# EAGLE board Qwiic GPS-RTK2 - ublox ZED-F9P (EAGLE 9.6.0)
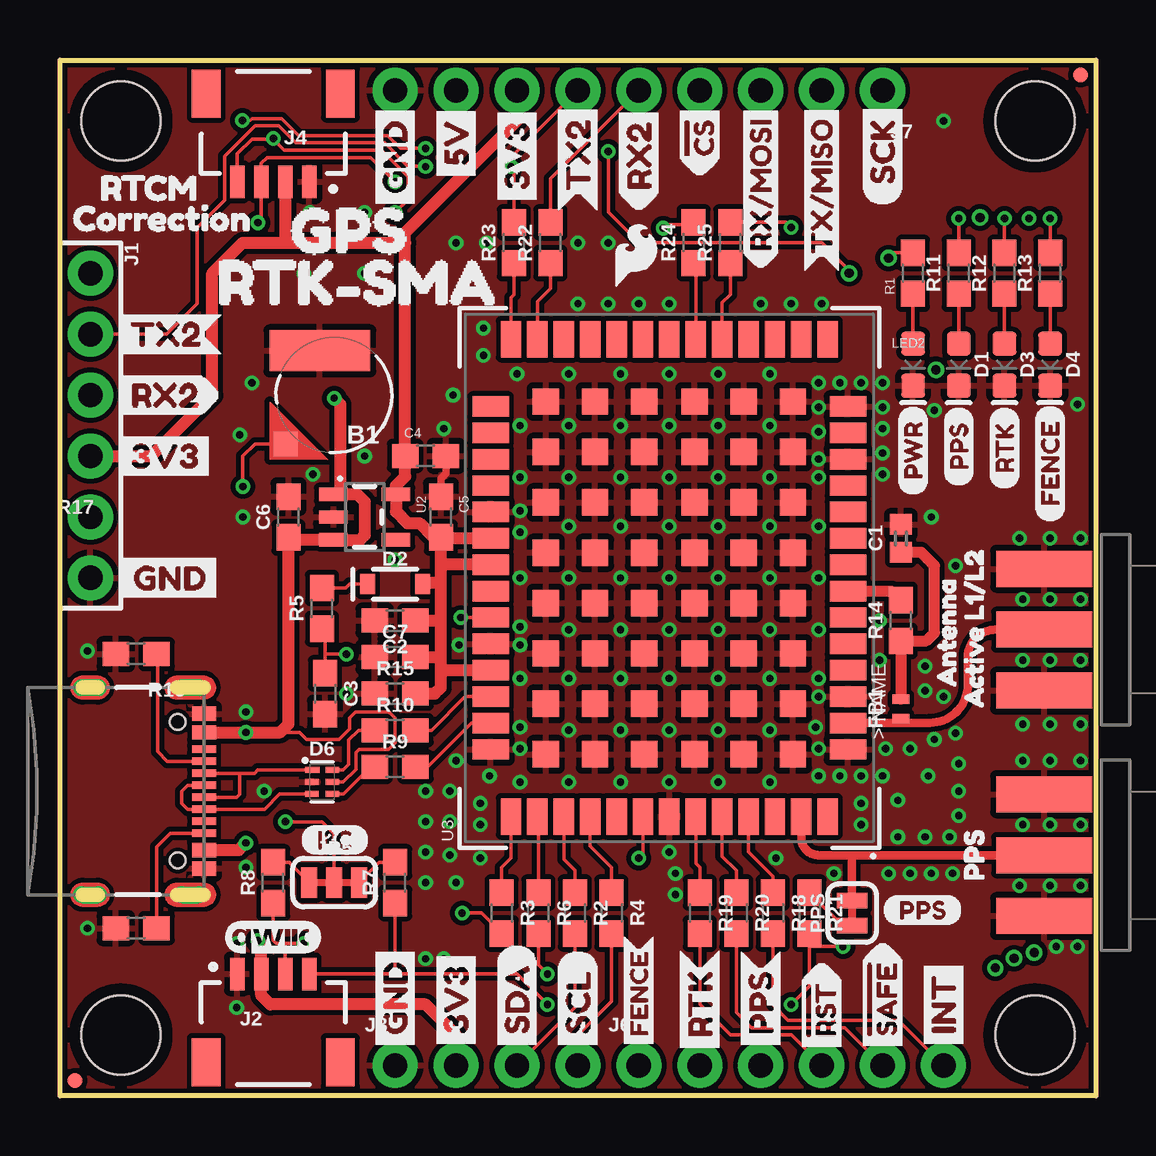
[diagram p0: board, top side]
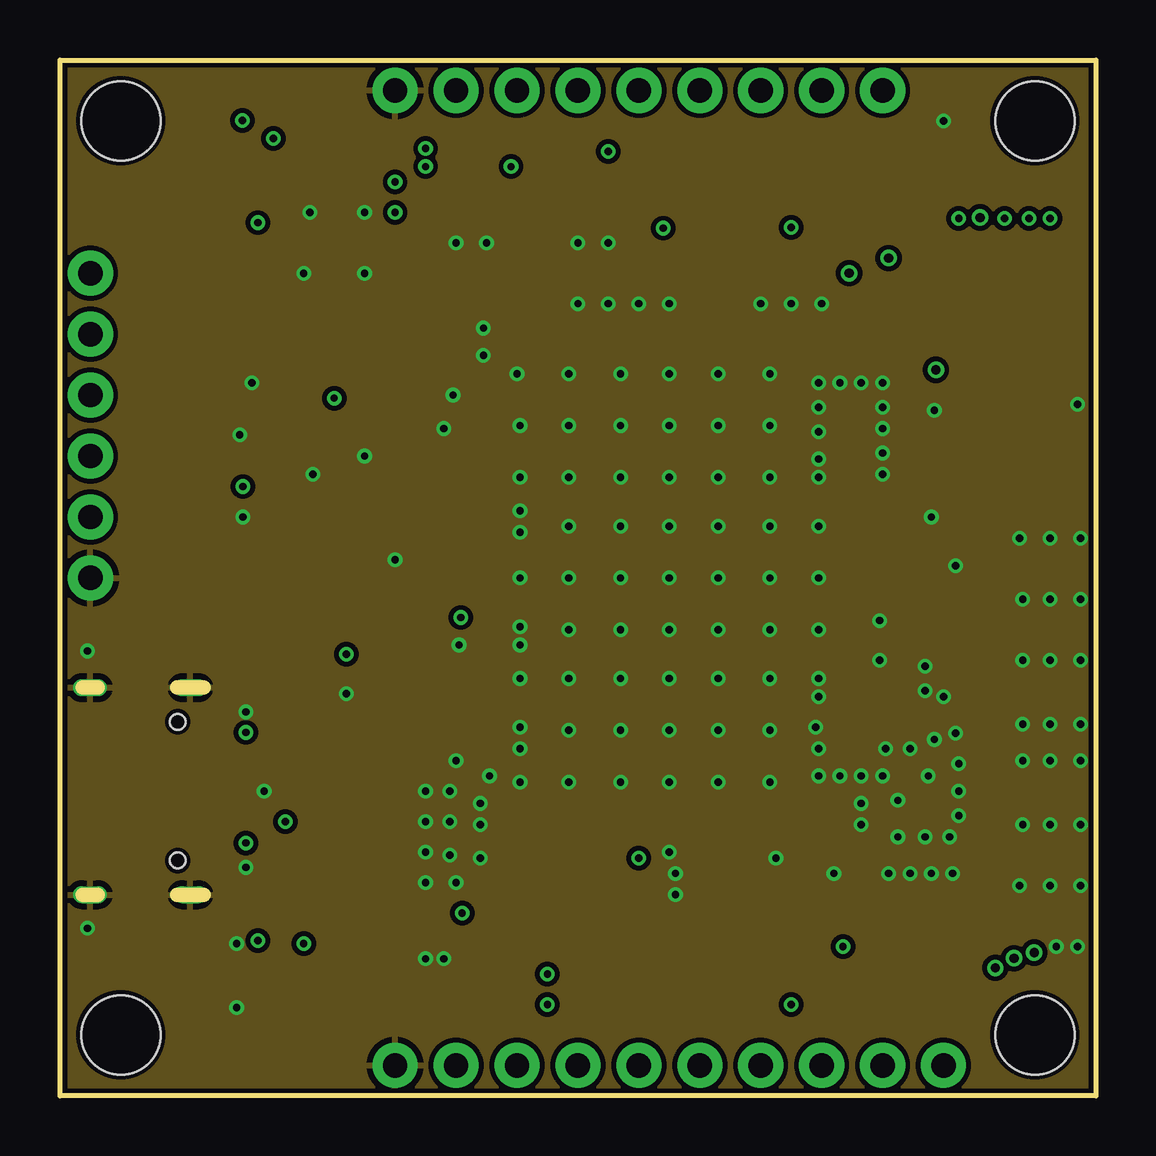
[diagram p1: board, inner layer Route2]
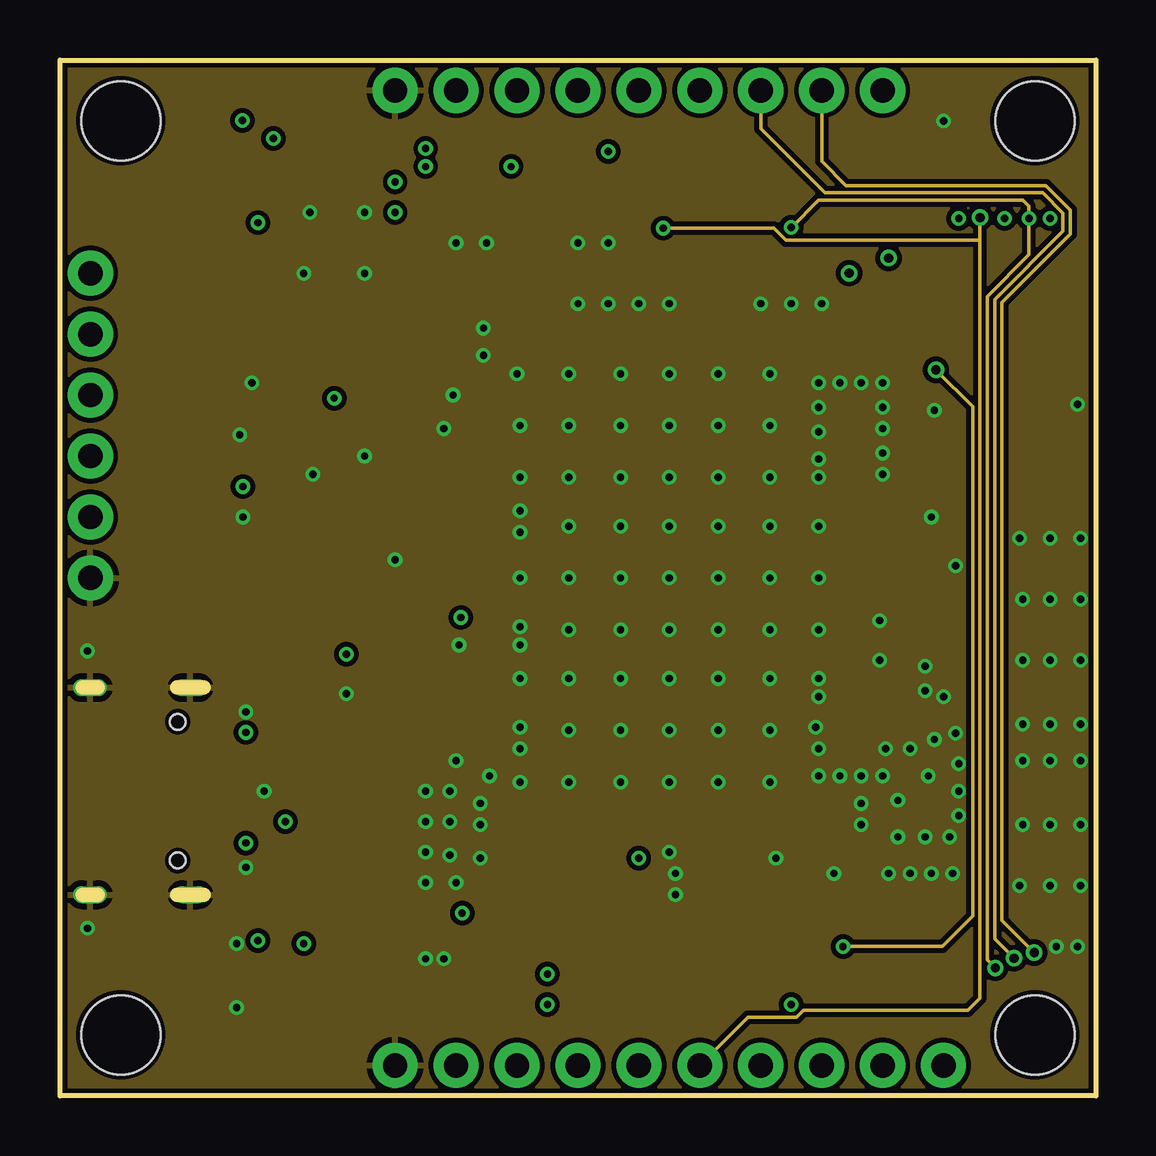
[diagram p2: board, inner layer Route15]
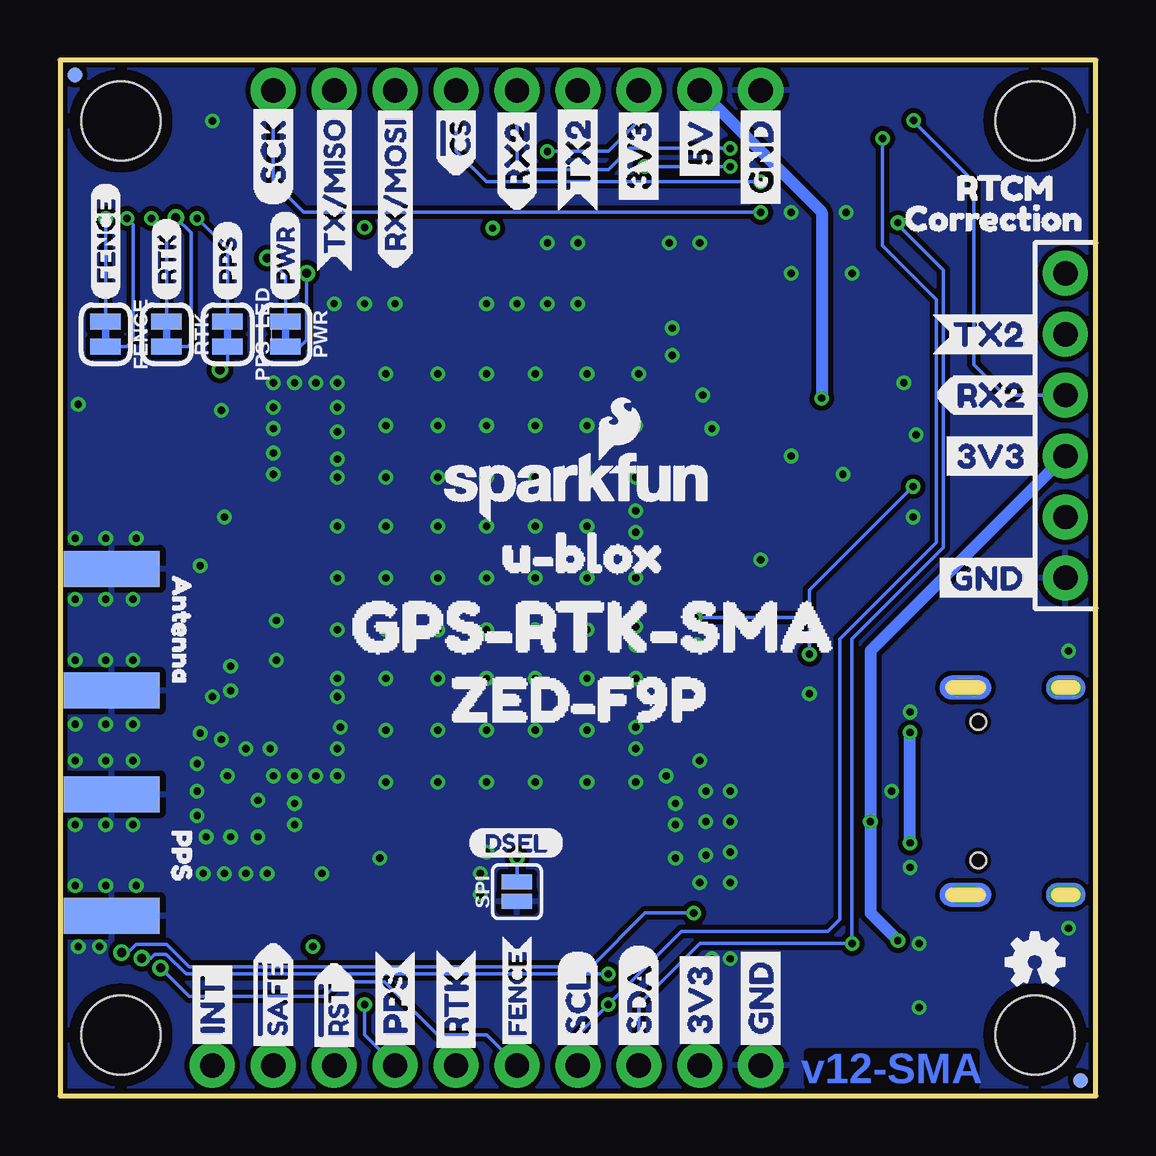
[diagram p3: board, bottom side, seen from below]

Size 43.18 x 43.18 mm. Coordinates in mm from the lower left corner, seen from the top.
Outline: 43.18,0 0,0 0,43.18 43.18,43.18 43.18,0
Copper layers (1+2*15+16): Top 0.035mm / dielectric 1.5mm / Route2 0.035mm / dielectric 0.15mm / Route15 0.035mm / dielectric 0.2mm / Bottom 0.035mm
Design rules "SparkFun-4-layer-MicroMod *": minimum track width 4mil, minimum drill 0.2mm, track to track 4mil, track to pad 4mil, pad to pad 4mil, via to via 4mil, smd to smd 4mil, copper to edge 6mil, drill to drill 6mil, minimum pad ring 6mil, minimum via ring 6mil, stop-mask expansion 4mil, vias tented up to drill 25mil, thermal gap 10mil
Net classes: 1 power: width 0.178 mm; 2 3.3V: width 0.508 mm; 3 RF: width 0.35 mm, clearance 0.203 mm

## Footprints (pad centres in the part's own frame; a part is rotated, then mirrored left to right if it is on the bottom)
ML414H_IV01E = smd 1 x 1: + 2.022,2.032 | smd 4.2 x 1.7: - 0.6,-1.85
0402 = smd 0.85 x 0.9: 1 -0.58,0; 2 0.58,0
0603 = smd 1.1 x 1: 1 -0.85,0; 2 0.85,0
LED-0603 = smd 1 x 1: A -0.877,0; C 0.877,0
SOD-323 = smd 0.63 x 0.83: A 1.15,0; C -1.15,0
SOT886 = smd 0.61 x 0.25: 1 -0.405,0.5 | smd 0.56 x 0.25: 2 -0.43,0; 3 -0.43,-0.5; 4 0.43,-0.5; 5 0.43,0; 6 0.43,0.5
SMA-EDGE = smd 1.5 x 4: GND@0 -2.54,0; GND@1 2.54,0; SIG 0,0 | smd 1.5 x 4 bottom: GND@2 -2.54,0; GND@3 2.54,0
0402_MURATA = smd 0.4 x 0.7: P1 -0.4,0; P2 0.4,0
SMT-JUMPER_2_NC_TRACE_SILK = smd 0.66 x 1.27: 1 -0.521,0; 2 0.521,0
1X06_NO_SILK = drill 1.016 pad 1.88: 1 0,0; 2 2.54,0; 3 5.08,0; 4 7.62,0; 5 10.16,0; 6 12.7,0
JST04_1MM_RA = smd 0.6 x 1.35: 1 -1.5,0; 2 -0.5,0; 3 0.5,0; 4 1.5,0 | smd 1.2 x 2: NC1 2.8,-3.675; NC2 -2.8,-3.675
1X04_NO_SILK = drill 1.016 pad 1.88: 1 0,0; 2 2.54,0; 3 5.08,0; 4 7.62,0
USB-C-16P-2LAYER-PADS = smd 0.3 x 1: A5 -1.25,-0.34; A6 -0.25,-0.34; A7 0.25,-0.34; A8 1.25,-0.34; B5 1.75,-0.34; B6 0.75,-0.34; B7 -0.75,-0.34; B8 -1.75,-0.34 | smd 0.6 x 1: GND -3.225,-0.34; GND2 3.225,-0.34; VBUS1 -2.45,-0.34; VBUS2 2.45,-0.34 | drill 0.4 pad 0.6 long: SHLD1 -4.318,-0.915; SHLD2 4.318,-0.915; SHLD3 -4.318,-5.095; SHLD4 4.318,-5.095 | hole 0.65: -2.89,-1.445; 2.89,-1.445
1X09_NO_SILK = drill 1.016 pad 1.88: 1 0,0; 2 2.54,0; 3 5.08,0; 4 7.62,0; 5 10.16,0; 6 12.7,0; 7 15.24,0; 8 17.78,0; 9 20.32,0
SMT-JUMPER_3_2-NC_TRACE_SILK = smd 0.66 x 1.27: 1 -1.041,0; 2 0,0; 3 1.041,0
MICRO-FIDUCIAL = smd 0.635 x 0.635: 1 0,0
STAND-OFF = hole 3.302: 0,0
SMT-JUMPER_2_NO_SILK = smd 0.635 x 1.27: 1 -0.406,0; 2 0.406,0
SOT23-5 = smd 0.55 x 1.2: 1 -0.95,-1.3; 2 0,-1.3; 3 0.95,-1.3; 4 0.95,1.3; 5 -0.95,1.3
ZED-F9P = smd 0.85 x 1.52: 1 -7.15,-7.45; 2 -6.05,-7.45; 3 -4.95,-7.45; 4 -3.85,-7.45; 5 -2.75,-7.45; 6 -1.65,-7.45; 7 -0.55,-7.45; 8 0.55,-7.45; 9 1.65,-7.45; 10 2.75,-7.45; 11 3.85,-7.45; 12 4.95,-7.45; 13 6.05,-7.45; 14 7.15,-7.45; 28 7.15,7.45; 29 6.05,7.45; 30 4.95,7.45; 31 3.85,7.45; 32 2.75,7.45; 33 1.65,7.45; 34 0.55,7.45; 35 -0.55,7.45; 36 -1.65,7.45; 37 -2.75,7.45; 38 -3.85,7.45; 39 -4.95,7.45; 40 -6.05,7.45; 41 -7.15,7.45 | smd 1.52 x 0.85: 15 9.95,-6.6; 16 9.95,-5.5; 17 9.95,-4.4; 18 9.95,-3.3; 19 9.95,-2.2; 20 9.95,-1.1; 21 9.95,0; 22 9.95,1.1; 23 9.95,2.2; 24 9.95,3.3; 25 9.95,4.4; 26 9.95,5.5; 27 9.95,6.6; 42 -9.95,6.6; 43 -9.95,5.5; 44 -9.95,4.4; 45 -9.95,3.3; 46 -9.95,2.2; 47 -9.95,1.1; 48 -9.95,0; 49 -9.95,-1.1; 50 -9.95,-2.2; 51 -9.95,-3.3; 52 -9.95,-4.4; 53 -9.95,-5.5; 54 -9.95,-6.6 | smd 1.1 x 1.1: 55 -1.05,-1.05; 56 -3.15,-1.05; 57 -5.25,-1.05; 58 -7.35,-1.05; 59 -1.05,-3.1; 60 -3.15,-3.1; 61 -5.25,-3.1; 62 -7.35,-3.1; 63 -1.05,-5.15; 64 -3.15,-5.15; 65 -5.25,-5.15; 66 -7.35,-5.15; 67 -1.05,5.15; 68 -3.15,5.15; 69 -5.25,5.15; 70 -7.35,5.15; 71 -1.05,3.1; 72 -3.15,3.1; 73 -5.25,3.1; 74 -7.35,3.1; 75 -1.05,1.05; 76 -3.15,1.05; 77 -5.25,1.05; 78 -7.35,1.05; 79 1.05,1.05; 80 3.15,1.05; 81 5.25,1.05; 82 7.35,1.05; 83 1.05,3.1; 84 3.15,3.1; 85 5.25,3.1; 86 7.35,3.1; 87 1.05,5.15; 88 3.15,5.15; 89 5.25,5.15; 90 7.35,5.15; 91 1.05,-5.15; 92 3.15,-5.15; 93 5.25,-5.15; 94 7.35,-5.15; 95 1.05,-3.1; 96 3.15,-3.1; 97 5.25,-3.1; 98 7.35,-3.1; 99 1.05,-1.05; 100 3.15,-1.05; 101 5.25,-1.05; 102 7.35,-1.05

## Placement (x,y rotation side)
B1  6.8MM_COIN_CELL  [ML414H_IV01E]  11.43,29.21 180 top
C1  47pF  [0402]  35.05,23.24 90 top
C2  1.0uF  [0603]  13.97,19.81 180 top
C3  1.0uF  [0603]  11.05,16.76 270 top
C4  1.0uF  [0603]  15.24,26.67 0 top
C5  0.1uF  [0603]  15.88,24.13 270 top
C6  1.0uF  [0603]  9.53,24.13 90 top
C7  0.1uF  [0603]  13.97,18.29 0 top
D1  Yellow  [LED-0603]  37.47,30.48 270 top
D2  0.5A/40V/420mV  [SOD-323]  13.97,21.34 0 top
D3  GREEN  [LED-0603]  39.37,30.48 270 top
D4  BLUE  [LED-0603]  41.27,30.48 270 top
D6  PRTR5V0U2F  [SOT886]  10.92,13.08 0 top
E1  SMA  [SMA-EDGE]  41.02,19.43 270 top
E2  SMA  [SMA-EDGE]  41.02,10.03 270 top
FB1  120NH  [0402_MURATA]  35.05,16.13 90 top
FENCE  [SMT-JUMPER_2_NC_TRACE_SILK]  41.27,31.75 270 bottom
FRAME2  FRAME-LEDGER  [CREATIVE_COMMONS]  -17.78,-26.67 0 top  (outside the outline)
J1  Radio  [1X06_NO_SILK]  1.27,34.29 270 top
J2  Qwiic Right Angle  [JST04_1MM_RA]  8.89,5.08 0 top
J3  PTH  [1X04_NO_SILK]  13.97,1.27 0 top
J4  Qwiic Right Angle  [JST04_1MM_RA]  8.89,38.1 180 top
J5  [USB-C-16P-2LAYER-PADS]  6.35,12.7 270 top
J6  [1X06_NO_SILK]  24.13,1.27 0 top
J7  [1X09_NO_SILK]  34.29,41.91 180 top
JP5  [SMT-JUMPER_3_2-NC_TRACE_SILK]  11.43,8.89 0 top
JP21  FIDUCIALUFIDUCIAL  [MICRO-FIDUCIAL]  42.55,42.55 90 top
JP31  STAND-OFF  [STAND-OFF]  2.54,2.54 90 top
JP41  STAND-OFF  [STAND-OFF]  2.54,40.64 90 top
JP61  FIDUCIALUFIDUCIAL  [MICRO-FIDUCIAL]  0.64,0.64 90 top
JP71  FIDUCIALUFIDUCIAL  [MICRO-FIDUCIAL]  42.55,42.55 270 bottom
JP81  FIDUCIALUFIDUCIAL  [MICRO-FIDUCIAL]  0.64,0.64 270 bottom
JP91  STAND-OFF  [STAND-OFF]  40.64,2.54 90 top
JP101  STAND-OFF  [STAND-OFF]  40.64,40.64 90 top
LED2  RED  [LED-0603]  35.56,30.48 270 top
LOGO1  OSHW-LOGOMINI  [OSHW-LOGO-MINI]  2.54,5.59 0 bottom
LOGO2  SFE_LOGO_NAME_FLAME.1_INCH  [SFE_LOGO_NAME_FLAME_.1]  21.59,25.4 0 bottom
PPS  [SMT-JUMPER_2_NC_TRACE_SILK]  33.02,7.62 90 top
PPS_LED  [SMT-JUMPER_2_NC_TRACE_SILK]  36.2,31.75 270 bottom
PWR  [SMT-JUMPER_2_NC_TRACE_SILK]  33.78,31.75 270 bottom
R1  1k  [0603]  35.56,34.29 90 top
R2  33  [0603]  21.46,7.62 270 top
R3  33  [0603]  18.41,7.62 270 top
R4  33  [0603]  22.99,7.62 270 top
R5  1k  [0603]  10.92,20.32 90 top
R6  33  [0603]  19.94,7.62 270 top
R7  2.2k  [0603]  13.97,8.89 90 top
R8  2.2k  [0603]  8.89,8.89 90 top
R9  27  [0603]  13.97,13.72 0 top
R10  27  [0603]  13.97,15.24 0 top
R11  1k  [0603]  37.47,34.29 90 top
R12  1k  [0603]  39.37,34.29 90 top
R13  1k  [0603]  41.27,34.29 90 top
R14  33  [0603]  35.05,19.81 90 top
R15  100k  [0603]  13.97,16.76 0 top
R16  5.1k  [0603]  3.17,6.99 0 top
R17  5.1k  [0603]  3.17,18.41 0 top
R18  33  [0603]  29.72,7.62 270 top
R19  33  [0603]  26.67,7.62 270 top
R20  33  [0603]  28.19,7.62 270 top
R21  33  [0603]  31.24,7.62 270 top
R22  33  [0603]  20.45,35.56 90 top
R23  33  [0603]  18.92,35.56 90 top
R24  33  [0603]  26.42,35.56 90 top
R25  33  [0603]  27.94,35.56 90 top
RTK  [SMT-JUMPER_2_NC_TRACE_SILK]  38.73,31.75 270 bottom
SPI  [SMT-JUMPER_2_NO_SILK]  24.13,8.51 90 bottom
U2  3.3V  [SOT23-5]  12.7,24.13 270 top
U3  ZED-F9P  [ZED-F9P]  25.4,21.59 90 top
U$1  [SDA-[)]  19.05,1.65 90 top
U$2  SPECIAL_INSTRUCTIONS-ORDERING  [ORDERING_INSTRUCTIONS]  57.15,54.61 0 top  (outside the outline)
U$3  [SCL-[)]  21.59,1.65 90 top
U$4  [SDA-[)]  19.05,1.65 90 bottom
U$5  [SCL-[)]  21.59,1.65 90 bottom
U$6  [3V3-04]  16.51,1.65 90 top
U$7  [3V3-04]  16.51,1.65 90 bottom
U$8  [GND-04]  13.97,1.65 90 top
U$9  [GND-04]  13.97,1.65 90 bottom
U$10  [I_SUPER2_C-()-03]  10.03,10.67 0 top
U$11  [FENCE2]  41.27,23.88 90 top
U$12  [PWR-()-03]  33.78,33.15 90 bottom
U$13  [RTK1]  39.37,25.27 90 top
U$14  [FENCE0]  24.13,1.78 90 top
U$15  [INT8]  36.83,1.65 90 top
U$16  [INT8]  36.83,1.65 90 bottom
U$17  [FENCE0]  24.13,1.78 90 bottom
U$18  [PWR-()-03]  35.56,25.02 90 top
U$19  [5V]  16.51,37.85 90 top
U$20  [5V]  16.51,37.85 90 bottom
U$21  [RX20]  24.13,36.83 90 top
U$22  [U#BLOX3]  26.16,22.61 0 bottom
U$23  [CS#-<]]  26.67,38.1 90 top
U$24  [CS#-<]]  26.67,38.1 90 bottom
U$25  [PPS0]  36.2,33.15 90 bottom
U$26  [RX#MOSI3]  29.21,34.42 90 top
U$27  [DSEL0]  26.16,10.54 0 bottom
U$28  [RTK1]  26.67,1.52 90 bottom
U$29  [RTK1]  26.67,1.52 90 top
U$30  [QWIIC_4MM]  8.89,6.6 0 top
U$31  [RX#MOSI3]  29.21,34.42 90 bottom
U$32  [RTK1]  38.73,33.15 90 bottom
U$33  [SFE_LOGO_FLAME_.1]  24,35.05 0 top
U$34  [TX#MISO1]  31.75,34.29 90 top
U$35  [#RST3]  31.75,1.4 90 top
U$36  [#RST3]  31.75,1.4 90 bottom
U$37  [TX#MISO1]  31.75,34.29 90 bottom
U$38  [SCK-(]-04]  34.29,37.08 90 top
U$39  [#SAFE1]  34.29,1.4 90 top
U$40  [#SAFE1]  34.29,1.4 90 bottom
U$41  [SCK-(]-04]  34.29,37.08 90 bottom
U$42  [RX22]  2.03,29.21 0 top
U$43  [PPS5]  29.21,1.65 90 top
U$44  [PPS5]  29.21,1.65 90 bottom
U$45  [GND3]  2.16,21.59 0 top
U$47  [PPS1]  38.1,8.26 90 top
U$48  [RTCM5]  6.73,37.85 0 bottom
U$49  [ZED#F9P6]  28.45,16.51 0 bottom
U$50  [TX21]  21.59,36.83 90 top
U$51  [TX23]  2.03,31.75 0 top
U$52  [PPS0]  37.47,25.4 90 top
U$53  [CORRECTION0]  8.89,36.58 0 bottom
U$54  [FENCE2]  41.27,33.15 90 bottom
U$55  [TX21]  21.59,36.83 90 bottom
U$56  [RX20]  24.13,36.83 90 bottom
U$57  [TX21]  6.86,31.75 0 bottom
U$58  [RX20]  6.73,29.21 0 bottom
U$59  [GPS0]  8,36.07 0 top
U$60  [3V3-04]  19.05,36.83 90 bottom
U$61  [3V3-04]  19.05,36.83 90 top
U$62  [GND-04]  13.97,36.7 90 bottom
U$63  [GND-04]  13.97,36.7 90 top
U$65  [ACTIVE_L1#L21]  38.1,15.49 90 top
U$66  [3V3-04]  2.03,26.67 0 top
U$67  [3V3-04]  6.73,26.67 0 bottom
U$68  [GND3]  6.99,21.59 0 bottom
U$69  [CORRECTION0]  -0.38,36.58 0 top
U$70  [RTCM5]  0.76,37.85 0 top
U$71  [ANTENNA2]  36.96,16.38 90 top
U$72  [PPS0]  34.29,7.75 0 top
U$73  [RTK#SMA4]  4.95,33.91 0 top
U$74  [PPS1]  38.1,11.81 270 bottom
U$75  [ANTENNA2]  38.1,22.35 270 bottom
U$76  [GPS#RTK#SMA5]  32.89,19.56 0 bottom

## Library data of the parts
B1 = SparkFun-Batteries; PROD_ID: BATT-14267
C1 = SparkFun-Capacitors; PROD_ID: CAP-15063
C2-C4 C6 = SparkFun-Capacitors; PROD_ID: CAP-13930
C5 C7 = SparkFun-Capacitors; PROD_ID: CAP-08604
D1 = SparkFun-LED; PROD_ID: DIO-09003
D2 = SparkFun-DiscreteSemi; PROD_ID: DIO-10955
D3 = SparkFun-LED; PROD_ID: DIO-00821
D4 = SparkFun-LED; PROD_ID: DIO-08575
D6 = SparkFun-IC-Power; PROD_ID: DIO-14084
E1 E2 = SparkFun-RF; PROD_ID: CONN-08289
FB1 = SparkFun-Coils; PROD_ID: NDUC-15072
FENCE JP5 PPS PPS_LED PWR RTK SPI = SparkFun-Jumpers
FRAME2 LOGO1 LOGO2 U$2 U$30 U$33 = SparkFun-Aesthetics
J1 J7 = SparkFun-Connectors
J2 J4 = SparkFun-Connectors; PROD_ID: CONN-13694
J3 = SparkX
J5 = SparkFun-Connectors; PROD_ID: CONN-14122
J6 = SparkFun-Connectors; PROD_ID: CONN-08437
JP21 JP31 JP41 JP61 JP71 JP81 JP91 JP101 = SparkFun
LED2 = SparkFun-LED; PROD_ID: DIO-00819
R1 R5 R11-R13 = SparkFun-Resistors; PROD_ID: RES-07856
R2-R4 R6 R14 R18-R25 = SparkFun-Resistors; PROD_ID: RES-08270
R7 R8 = SparkFun-Resistors; PROD_ID: RES-08272
R9 R10 = SparkFun-Resistors; PROD_ID: RES-09334
R15 = SparkFun-Resistors; PROD_ID: RES-07828
R16 R17 = SparkFun-Resistors; PROD_ID: RES-12083
U2 = SparkFun-IC-Power; PROD_ID: VREG-12457
U3 = ZED-F9P
U$1 U$3-U$10 U$12 U$18-U$20 U$23 U$24 U$38 U$41 U$60-U$63 U$66 U$67 = Labels
U$11 U$13 U$32 U$54 = buzzard_labels
U$14 U$17 U$28 U$29 = buzzard_labels (1)
U$15 U$16 U$22 = buzzard_labels (5)
U$21 U$42 U$50 U$51 U$55-U$58 = buzzard_labels (10)
U$25 U$52 U$72 = buzzard_labels (33)
U$26 U$31 U$34 U$37 = buzzard_labels (36)
U$27 = buzzard_labels (6)
U$35 U$36 U$39 U$40 U$43 U$44 = buzzard_labels (7)
U$45 U$48 U$49 U$53 U$59 U$68-U$70 U$76 = buzzard_labels (4)
U$47 U$74 = buzzard_labels (2)
U$65 U$71 U$75 = buzzard_labels (8)
U$73 = buzzard_labels (3)

## Nets
3.3V: C2.1 C4.1 C5.2 C7.2 D2.A J1.4 J2.2 J3.2 J4.2 J7.7 JP5.2 PWR.2 R15.2 U2.5 U3.33 U3.34 U3.38
5V: C6.1 D6.5 J5.VBUS1 J5.VBUS2 J7.8 U2.1 U2.3
!RESET: J6.4 R19.2
!SAFE: J6.5 R20.2
ANT_VCC: C1.1 FB1.P2 R14.1
BACKUP: B1.+ C3.1 R5.1 U3.36
CC1: J5.A5 R17.2
CC2: J5.B5 R16.2
D+: D6.4 R9.1
D-: D6.6 R10.1
D_SEL: SPI.2 U3.47
FENCE_STAT: FENCE.2 J6.1 R25.2
GND: B1.- C1.2 C2.2 C3.2 C4.2 C5.1 C6.2 C7.1 D1.C D3.C D4.C D6.2 E1.GND@0 E1.GND@1 E1.GND@2 E1.GND@3 E2.GND@0 E2.GND@1 E2.GND@2 E2.GND@3 J1.6 J2.1 J3.1 J4.1 J5.GND J5.GND2 J5.SHLD1 J5.SHLD2 J5.SHLD3 J5.SHLD4 J7.9 LED2.C R15.1 R16.1 R17.1 SPI.1 U2.2 U3.1 U3.3 U3.12 U3.14 U3.32 U3.37 U3.41 U3.48 U3.55 U3.56 U3.57 U3.58 U3.59 U3.60 U3.61 U3.62 U3.63 U3.64 U3.65 U3.66 U3.67 U3.68 U3.69 U3.70 U3.71 U3.72 U3.73 U3.74 U3.75 U3.76 U3.77 U3.78 U3.79 U3.80 U3.81 U3.82 U3.83 U3.84 U3.85 U3.86 U3.87 U3.88 U3.89 U3.90 U3.91 U3.92 U3.93 U3.94 U3.95 U3.96 U3.97 U3.98 U3.99 U3.100 U3.101 U3.102
GPS_ANT1 [RF]: E1.SIG FB1.P1 U3.2
INT: J6.6 R18.2
N$1: D3.A R12.1
N$2: D1.A R11.1
N$3: R12.2 RTK.1
N$4: PPS_LED.1 R11.2
N$5: JP5.1 R8.2
N$6: D2.C R5.2
N$7: D4.A R13.1
N$8: JP5.3 R7.2
N$9: FENCE.1 R13.2
N$10: LED2.A R1.1
N$11: R9.2 U3.40
N$12: R10.2 U3.39
N$13: R14.2 U3.7
N$14: R22.1 U3.26
N$15: R18.1 U3.51
N$16: R19.1 U3.49
N$17: PWR.1 R1.2
N$18: R20.1 U3.50
N$19: R24.1 U3.20
N$20: R25.1 U3.19
N$21: PPS.1 R21.1
PPS [RF]: E2.SIG PPS.2 U3.53
PPS_STAT: J6.3 PPS_LED.2 R21.2
RTK_STAT: J6.2 R24.2 RTK.2
RX2: J1.3 J7.5 R22.2
RXI/MOSI: J7.3 R6.2
RXLV: R6.1 U3.43
SCL/SCK: J2.4 J3.4 J4.4 J7.1 R4.2 R7.1
SCL_LV: R4.1 U3.45
SDA/!CS: J2.3 J3.3 J4.3 J7.4 R2.2 R8.1
SDA_LV: R2.1 U3.44
TX2: J1.2 J7.6 R23.2
TX2_P: R23.1 U3.27
TXLV: R3.1 U3.42
TXO/MISO: J7.2 R3.2
UNP_D+: D6.3 J5.A6 J5.B6
UNP_D-: D6.1 J5.A7 J5.B7

## Tracks (layer width: path | path; a pad name or v marks a point on that pad's centre or on a via)
3.3V  (via drill 0.3, 0.38)
  Top 0.152: v22.86,39.37 22.86,36.83 24.13,35.56 31.75,35.56 32.89,34.42 v32.89,34.29 | JP5.2 11.43,10.92 10.92,11.43 v9.4,11.43
  Top 0.508: J3.2 16.51,2.54 15.24,3.81 8.76,3.81 8.39,4.18 J2.2 8.39,6.34 v8.26,6.48 | U3.33 15.91,23.24 C5.2 | 15.88,21.38 15.12,21.38 D2.A | C5.2 15.58,23.28 14.99,23.88 14.48,23.88 14,24.35 U2.5 14,25.43 14.39,25.82 C4.1 14.39,35.56 | J7.7 19.05,40.64 14.39,35.98 14.39,35.56 | 9.53,35.56 7.62,35.56 6.35,34.29 6.35,29.21 3.81,26.67 J1.4 | 9.53,35.56 14.39,35.56 | 9.53,35.56 9.39,35.7 J4.2 | 15.88,18.29 15.88,19.81 | 15.88,19.81 15.88,21.38 | 15.88,21.38 15.88,22.1 | 15.88,22.1 C5.2 | U3.34 15.92,22.14 15.88,22.1 | C2.1 15.88,19.81 | C7.2 15.88,18.29 | R15.2 15.62,16.76 15.88,17.02 15.88,17.78 | 15.88,17.78 15.88,18.29 | U3.38 15.91,17.74 15.88,17.78
  Bottom 0.152: v22.86,39.37 20.32,39.37 19.05,40.64 J7.7 | v32.89,34.29 32.89,31.5 33.16,31.23 PWR.2
  Bottom 0.508: v8.26,6.48 9.4,7.62 v9.4,11.43 9.4,18.54 J1.4
5V  (via drill 0.3)
  Top 0.152: 9.18,15.15 10,15.15 10.29,14.86 11.63,14.86 12.06,15.29 12.06,15.75 12.32,16 13.72,16 13.75,15.97 13.77,15.97 13.97,15.76 13.97,14.72 13.7,14.45 12.47,14.45 12.34,14.31 12.34,13.61 11.81,13.08 D6.5
  Top 0.508: J5.VBUS1 v7.75,15.15 9.18,15.15 9.53,15.49 C6.1 9.62,23.18 U2.3 12.51,23.18 12.7,23.37 12.7,24.77 12.38,25.08 11.68,25.08 | U2.1 11.68,25.08 | v11.43,29.08 11.68,28.83 11.68,25.08 | J5.VBUS2 7.46,10.25 v7.75,10.54
  Bottom 0.508: v11.43,29.08 11.43,36.83 J7.8 | v7.75,10.54 v7.75,15.15
!RESET
  Top 0.152: J6.4 30.48,2.54 27.94,2.54 26.67,3.81 R19.2
!SAFE
  Top 0.152: J6.5 32.72,2.85 28.83,2.85 28.19,3.48 R20.2
ANT_VCC
  Top 0.457: FB1.P2 R14.1 36.11,18.96 36.45,19.3 36.45,22.1 36.32,22.23 36.16,22.39 35.89,22.66 C1.1
BACKUP  (via drill 0.3)
  Top 0.152: U3.36 v16.71,19.94 | C3.1 11.05,18.41 | 11.05,18.41 11.05,19.34 R5.1 | v11.94,18.41 11.05,18.41 | B1.+ 8.13,27.18 7.62,26.67 v7.62,25.4
  Bottom 0.152: v16.71,19.94 11.94,19.94 | v7.62,25.4 11.94,21.08 11.94,19.94 | v11.94,18.41 11.94,19.94
CC1
  Top 0.152: J5.A5 4.46,13.95 4.06,14.35 4.06,18.38 R17.2
CC2
  Top 0.152: J5.B5 4.6,10.95 4.03,10.38 R16.2
D+
  Top 0.152: R9.1 12.95,13.72 11.82,12.58 D6.4
D-
  Top 0.152: R10.1 12.45,15.24 12.04,14.83 12.04,13.81 11.81,13.59 D6.6
D_SEL  (via drill 0.3)
  Top 0.152: U3.47 24.3,10.08 v24.13,9.91
  Bottom 0.152: v24.13,9.91 SPI.2
FENCE_STAT  (via drill 0.3, 0.38)
  Top 0.152: R25.2 30.27,36.41 v30.48,36.2
  Route15 0.152: v38.99,5.33 38.66,5.66 38.66,33.33 40.39,35.06 v40.39,36.58 40.39,37.08 40.13,37.34 31.62,37.34 v30.48,36.2
  Bottom 0.152: J6.1 25.4,2.54 27.43,2.54 29.64,4.75 31.55,4.75 32.16,4.14 37.8,4.14 v38.99,5.33 | FENCE.2 40.4,31.23 40.13,31.5 40.13,36.32 v40.39,36.58
GND  (via drill 0.3)
  Top 0.305: C4.2 16.09,25.96 15.88,25.74 C5.1
  other vias: 29.59,13.08 11.94,16.76 10.54,25.91 7.49,27.56 16,27.81 34.29,26.8 34.29,28.7 34.42,14.48 35.43,14.48 36.45,14.86 36.07,16.89 8.51,12.7 10.41,36.83 7.37,6.35 7.75,9.53 7.75,16 31.62,14.48 31.62,13.34 32.51,13.34 33.4,13.34 34.29,13.34 31.5,15.37 31.62,16.64 31.62,26.54 31.62,28.7 31.62,29.72 32.51,29.72 33.4,29.72 34.29,29.72 19.18,24.38 19.18,18.8 27.43,13.08 25.4,13.08 23.37,13.08 21.21,13.08 19.18,14.48 21.21,15.24 21.21,17.4 23.37,17.4 23.37,15.24 25.4,15.24 25.4,17.4 27.43,17.4 27.43,15.24 29.59,15.24 29.59,17.4 29.59,19.43 27.43,19.43 25.4,19.43 23.37,19.43 21.21,19.43 21.21,21.59 21.21,23.75 23.37,23.75 23.37,21.59 25.4,21.59 25.4,23.75 27.43,23.75 27.43,21.59 29.59,21.59 29.59,23.75 29.59,25.78 27.43,25.78 25.4,25.78 23.37,25.78 21.21,25.78 21.21,27.94 21.21,30.1 23.37,30.1 23.37,27.94 25.4,27.94 25.4,30.1 27.43,30.1 27.43,27.94 29.59,27.94 29.59,30.1 31.62,27.69 25.4,10.16 37.34,22.1 36.2,13.34 36.83,16.64 36.07,17.91 17.91,13.34 16.51,13.97 33.4,11.3 33.4,12.19 17.53,12.19 17.53,11.3 19.05,30.1 19.18,27.94 19.18,25.78 19.18,21.59 19.18,19.56 19.18,17.4 19.18,15.37 19.18,13.08 31.62,17.4 31.62,19.43 31.62,21.59 31.62,23.75 31.62,25.78 17.65,32 17.65,30.86 19.18,23.5 34.29,27.81 34.29,25.91 36.83,40.64 21.59,35.56 12.7,36.83 12.7,34.29 10.16,34.29 8,29.72 13.97,22.35 12.7,26.67 1.14,18.54 1.14,6.99 7.37,3.68 29.84,9.91 34.16,18.16 34.16,19.81 15.24,5.71 16,5.71 15.24,8.89 16.51,8.89 15.24,10.16 15.24,11.43 15.24,12.7 25.65,8.38 31.75,33.02 30.48,33.02 29.21,33.02 24.13,33.02 25.4,33.02 22.86,33.02 21.59,33.02 16.38,29.21 17.78,35.56 16.51,35.56 22.86,35.56 25.65,9.27 16.26,12.7 16.26,11.43 16.26,10.03 17.53,9.91 37.47,13.84 34.92,12.32 36.32,24.13 16.64,18.8 7.62,24.13 42.55,13.97 41.27,13.97 40.13,13.97 37.34,15.11 42.55,11.3 41.27,11.3 40.13,11.3 42.55,8.76 41.27,8.76 40.01,8.76 42.42,6.22 41.53,6.22 37.47,12.7 37.47,11.68 37.21,9.27 36.32,9.27 35.43,9.27 34.54,9.27 32.26,9.27 34.92,10.79 36.07,10.79 37.08,10.79 40.13,15.49 41.27,15.49 42.55,15.49 42.55,18.16 41.27,18.16 40.13,18.16 40.13,20.7 41.27,20.7 42.55,20.7 42.55,23.24 41.27,23.24 40.01,23.24 36.45,28.57 42.42,28.83
  pour Top (isolate 0.203, rank 4): 0,0 0,43.18 43.18,43.18 43.18,0
  pour Bottom (isolate 0.203, rank 4): 0,0 0,43.18 43.18,43.18 43.18,0
  pour Route2 (isolate 0.203): 0,43.18 43.18,43.18 43.18,0 0,0
  pour Route15 (isolate 0.203): 0,43.18 43.18,43.18 43.18,0 0,0
GPS_ANT1
  Top 0.35: E1.SIG 38.99,19.43 arc90 37.85,18.29 37.85,17.14 arc-90 36.25,15.55 36.24,15.54 36.17,15.54 36.16,15.54 35.05,15.54 | U3.2 35.05,15.54 | FB1.P1 35.05,15.54
INT
  Top 0.152: J6.6 34.95,3.15 30.35,3.15 29.72,3.79 R18.2
N$1
  Top 0.152: R12.1 D3.A
N$2
  Top 0.152: R11.1 D1.A
N$3  (via drill 0.3)
  Top 0.152: v39.37,36.58 R12.2
  Bottom 0.152: RTK.1 38.73,35.94 v39.37,36.58
N$4  (via drill 0.3)
  Top 0.152: v37.47,36.58 R11.2
  Bottom 0.152: PPS_LED.1 36.2,35.31 v37.47,36.58
N$5
  Top 0.152: R8.2 9.56,9.74 9.56,9.71 JP5.1
N$6
  Top 0.152: R5.2 11.9,21.17 12.06,21.34 D2.C
N$7
  Top 0.152: R13.1 D4.A
N$8
  Top 0.152: R7.2 13.3,9.74 12.47,8.91 JP5.3
N$9  (via drill 0.3)
  Top 0.152: v41.27,36.58 R13.2
  Bottom 0.152: FENCE.1 v41.27,36.58
N$10
  Top 0.152: R1.1 LED2.A
N$11
  Top 0.152: R9.2 15.33,13.72 17.15,15.54 U3.40
N$12
  Top 0.152: U3.39 16.89,16.64 15.49,15.24 R10.2
N$13
  Top 0.457: U3.7 34.67,21.04 R14.2
N$14
  Top 0.152: U3.26 19.9,33.11 20.45,33.66 R22.1
N$15
  Top 0.152: U3.51 28.7,10.16 29.72,9.14 R18.1
N$16
  Top 0.152: U3.49 26.5,9.7 26.67,9.53 R19.1
N$17  (via drill 0.38)
  Top 0.152: v34.54,34.92 34.76,35.14 R1.2
  Bottom 0.152: PWR.1 33.78,34.16 v34.54,34.92
N$18
  Top 0.152: U3.50 27.6,9.99 28.19,9.4 R20.1
N$19
  Top 0.152: R24.1 26.5,34.63 U3.20
N$20
  Top 0.152: U3.19 27.6,33.06 27.94,33.4 R25.1
N$21
  Top 0.152: R21.1 32.61,7.1 PPS.1
PPS
  Top 0.35: E2.SIG 33.02,10.03 | 33.02,10.03 31.62,10.03 arc-90 30.9,10.76 U3.53 | PPS.2 33.02,10.03
PPS_STAT  (via drill 0.3, 0.38)
  Top 0.152: v30.48,3.81 31.24,4.57 31.24,6.22 | 31.24,6.22 R21.2 | v32.64,6.22 31.24,6.22
  Route15 0.152: v32.64,6.22 36.78,6.22 38.05,7.49 38.05,28.73 v36.51,30.26
  Bottom 0.152: v30.48,3.81 30.48,2.54 J6.3 | v36.51,30.26 36.2,30.58 PPS_LED.2
RTK_STAT  (via drill 0.3, 0.38)
  Top 0.152: R24.2 26.33,36.32 25.15,36.32 v25.15,36.17
  Route15 0.152: v25.15,36.17 29.75,36.17 30.26,35.66 38.33,35.66 38.35,35.69 | J6.2 28.68,3.28 30.7,3.28 30.98,3.56 37.85,3.56 38.35,4.06 38.35,35.69 | 38.35,35.69 v38.35,36.61
  Bottom 0.152: RTK.2 37.86,31.23 37.72,31.37 37.72,35.98 v38.35,36.61
RX2  (via drill 0.3)
  Top 0.152: v7.6,40.66 7.92,40.66 8,40.74 9.24,40.74 9.95,40.03 13.66,40.03 14.19,39.5 v15.24,39.5 | R22.2 20.45,38.23 J7.5
  Bottom 0.152: v7.6,40.66 7.62,40.64 5.08,38.1 5.08,30.48 3.81,29.21 J1.3 | v15.24,39.5 19.43,39.5 20.32,38.61 23.75,38.61 24.13,38.99 J7.5
RXI/MOSI  (via drill 0.3, 0.38)
  Top 0.152: R6.2 19.94,5.46 v20.32,5.08
  Route15 0.152: J7.3 29.21,40.31 31.88,37.64 40.96,37.64 41.81,36.8 41.81,36.04 38.96,33.2 38.96,6.54 v39.77,5.74
  Bottom 0.152: v20.32,5.08 37.93,5.08 38.75,5.91 39.23,5.91 39.4,5.74 v39.77,5.74
RXLV
  Top 0.152: U3.43 19.94,11.6 R6.1
SCL/SCK  (via drill 0.3)
  Top 0.152: J3.4 21.59,2.54 22.99,3.94 R4.2 | v20.32,3.81 19.05,5.08 13.97,5.08 | J2.4 13.97,5.08 | R7.1 13.97,5.08 | J4.4 7.39,39.27 8,39.88 8.87,39.88 8.88,39.89 | v8.89,39.9 8.88,39.89 | 8.88,39.89 9.35,39.42 13.4,39.42 14.5,38.32 14.5,37.36 v13.97,36.83
  Bottom 0.152: J3.4 21.59,2.54 v20.32,3.81 17.27,6.86 11.18,6.86 10.67,7.37 10.67,19.05 6.66,23.06 6.66,33.2 8.89,35.43 v8.89,39.9 | J7.1 34.29,38.1 33.02,36.83 v13.97,36.83
SCL_LV
  Top 0.152: U3.45 22.1,10.41 22.99,9.53 R4.1
SDA/!CS  (via drill 0.3)
  Top 0.152: R2.2 21.46,3.68 J3.3 | R8.1 8.89,6.48 9.02,6.35 9.4,6.35 | v10.16,6.35 9.4,6.35 | 9.4,6.35 9.39,6.34 J2.3 | v13.97,38.1 12.95,39.12 8.64,39.12 8.39,38.87 J4.3 8.39,36.53 v8.26,36.4
  Bottom 0.152: J3.3 19.05,3.81 16.51,6.35 v10.16,6.35 10.16,19.05 6.35,22.86 6.35,34.42 8.26,36.32 v8.26,36.4 | J7.4 26.67,39.37 25.4,38.1 v13.97,38.1
SDA_LV
  Top 0.152: U3.44 21,9.86 21.46,9.4 R2.1
TX2  (via drill 0.3)
  Top 0.152: J7.6 18.8,39.12 v18.8,38.73 18.92,38.61 R23.2 | v15.24,38.73 15.22,38.76 14.5,38.76 13.53,39.73 9.82,39.73 9.11,40.44 8.13,40.44 6.86,39.17 6.86,37.34 5.71,36.2 5.71,33.02 4.45,31.75 J1.2
  Bottom 0.152: v15.24,38.73 v18.8,38.73
TX2_P
  Top 0.152: U3.27 18.8,33.28 18.92,33.4 R23.1
TXLV
  Top 0.152: U3.42 18.8,9.91 18.41,9.53 R3.1
TXO/MISO  (via drill 0.3, 0.38)
  Top 0.152: R3.2 17.57,7.62 v16.76,7.62
  Route15 0.152: J7.2 31.75,38.96 32.77,37.95 41.09,37.95 42.11,36.92 42.11,35.92 39.27,33.07 39.27,7.31 v40.61,5.97
  Bottom 0.152: v16.76,7.62 18.8,7.62 21.03,5.38 37.8,5.38 38.72,6.31 40.01,6.31 40.35,5.97 v40.61,5.97
UNP_D+
  Top 0.152: J5.A6 5.33,12.95 5.08,12.7 5.08,12.19 5.32,11.95 J5.B6 8.52,11.95 9.15,12.58 D6.3
UNP_D-
  Top 0.152: J5.B7 7.49,13.45 | 7.49,13.45 8.12,13.45 8.25,13.58 D6.1 | J5.A7 7.37,12.45 7.49,12.57 7.49,13.45

## Text on the board
Bottom: v12-SMA
Measures: Measurements in inches
tDocu: Board thickness is 1.6mm | 4 Layer Board | No clean process